# Altium PCB PCB2.PcbDoc
Units mm, origin at the board's own origin, x right, y up, seen from the top; angles counter-clockwise.
Board outline 56.1 x 45.5 mm, 2 copper layers (Top Layer, Bottom Layer); 35 components, 23 nets, 86 pads, 0 vias.
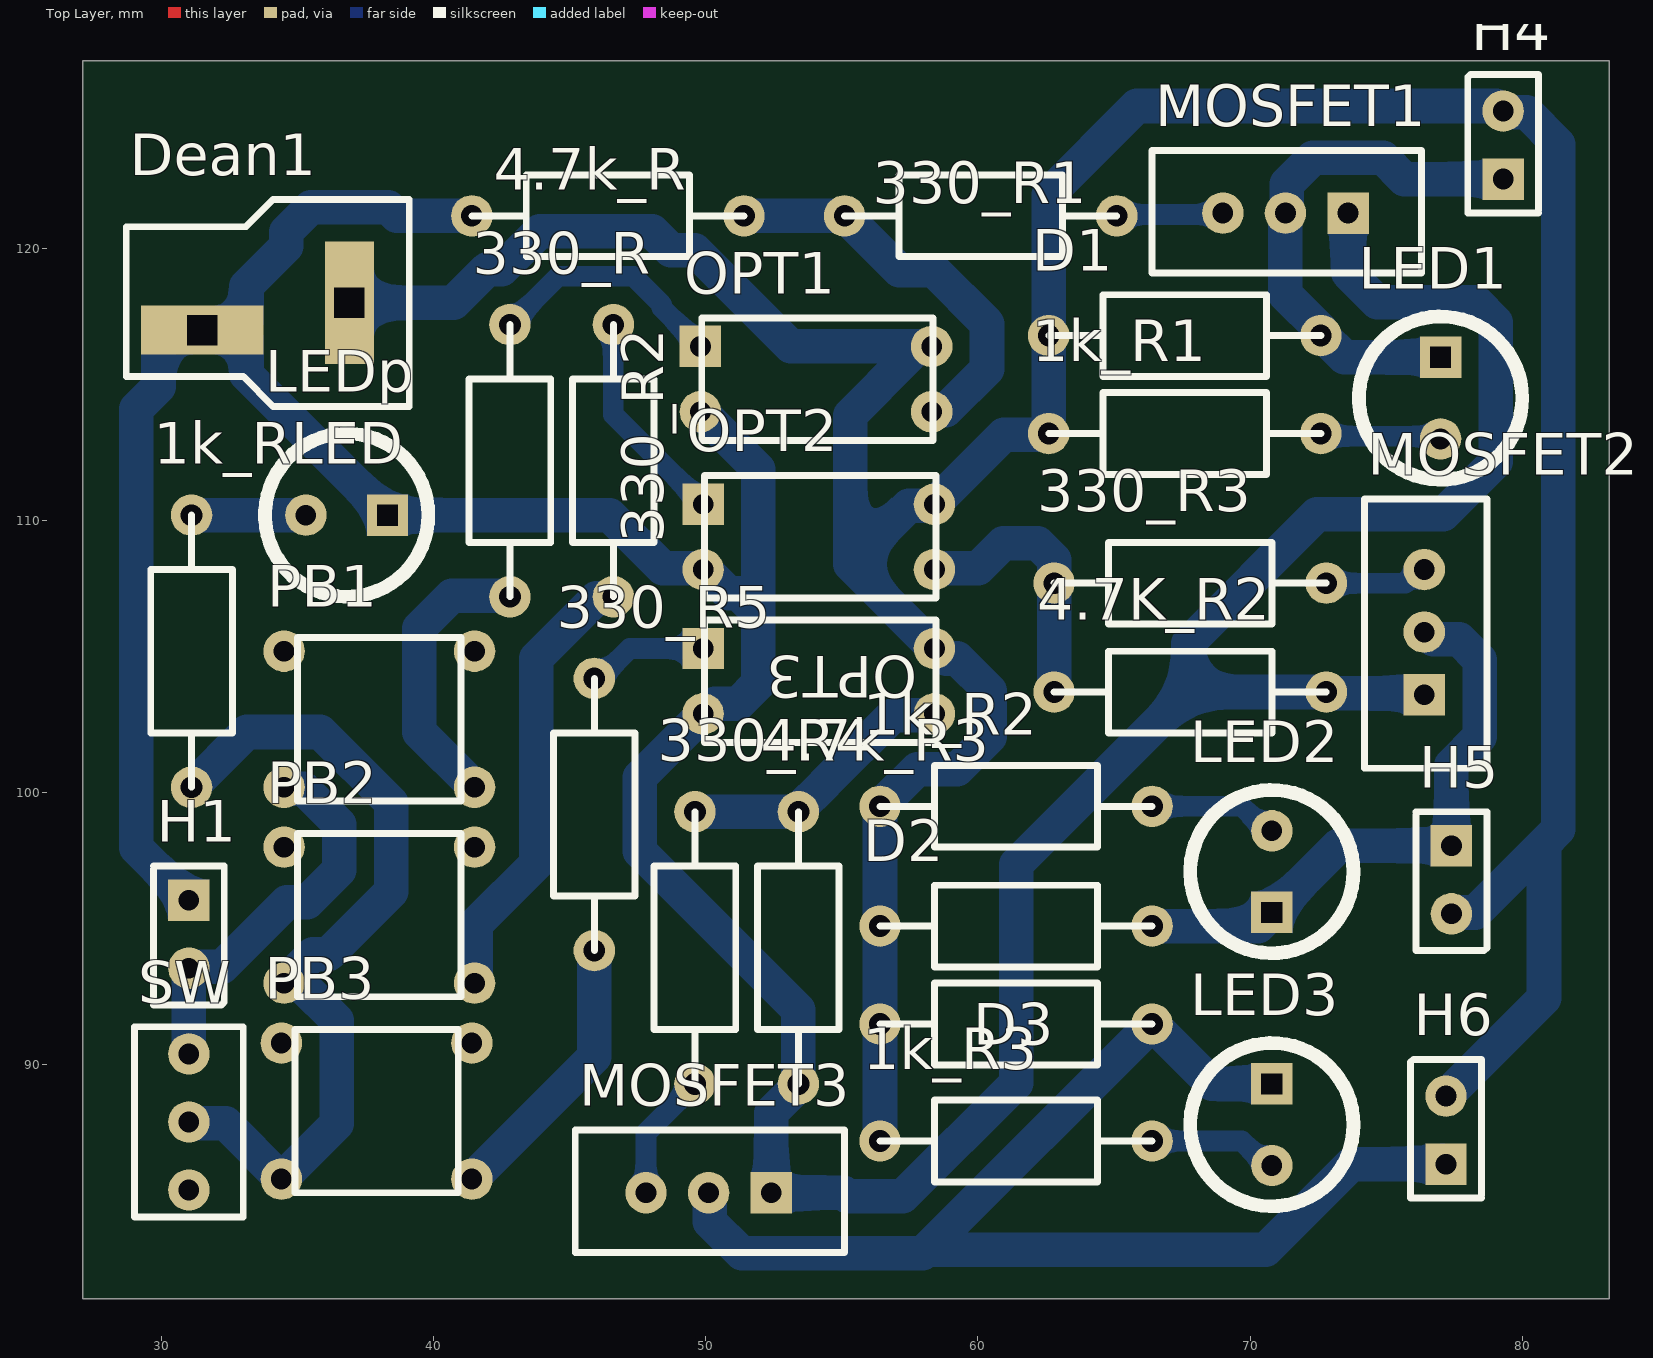
[diagram p0: Top Layer view]
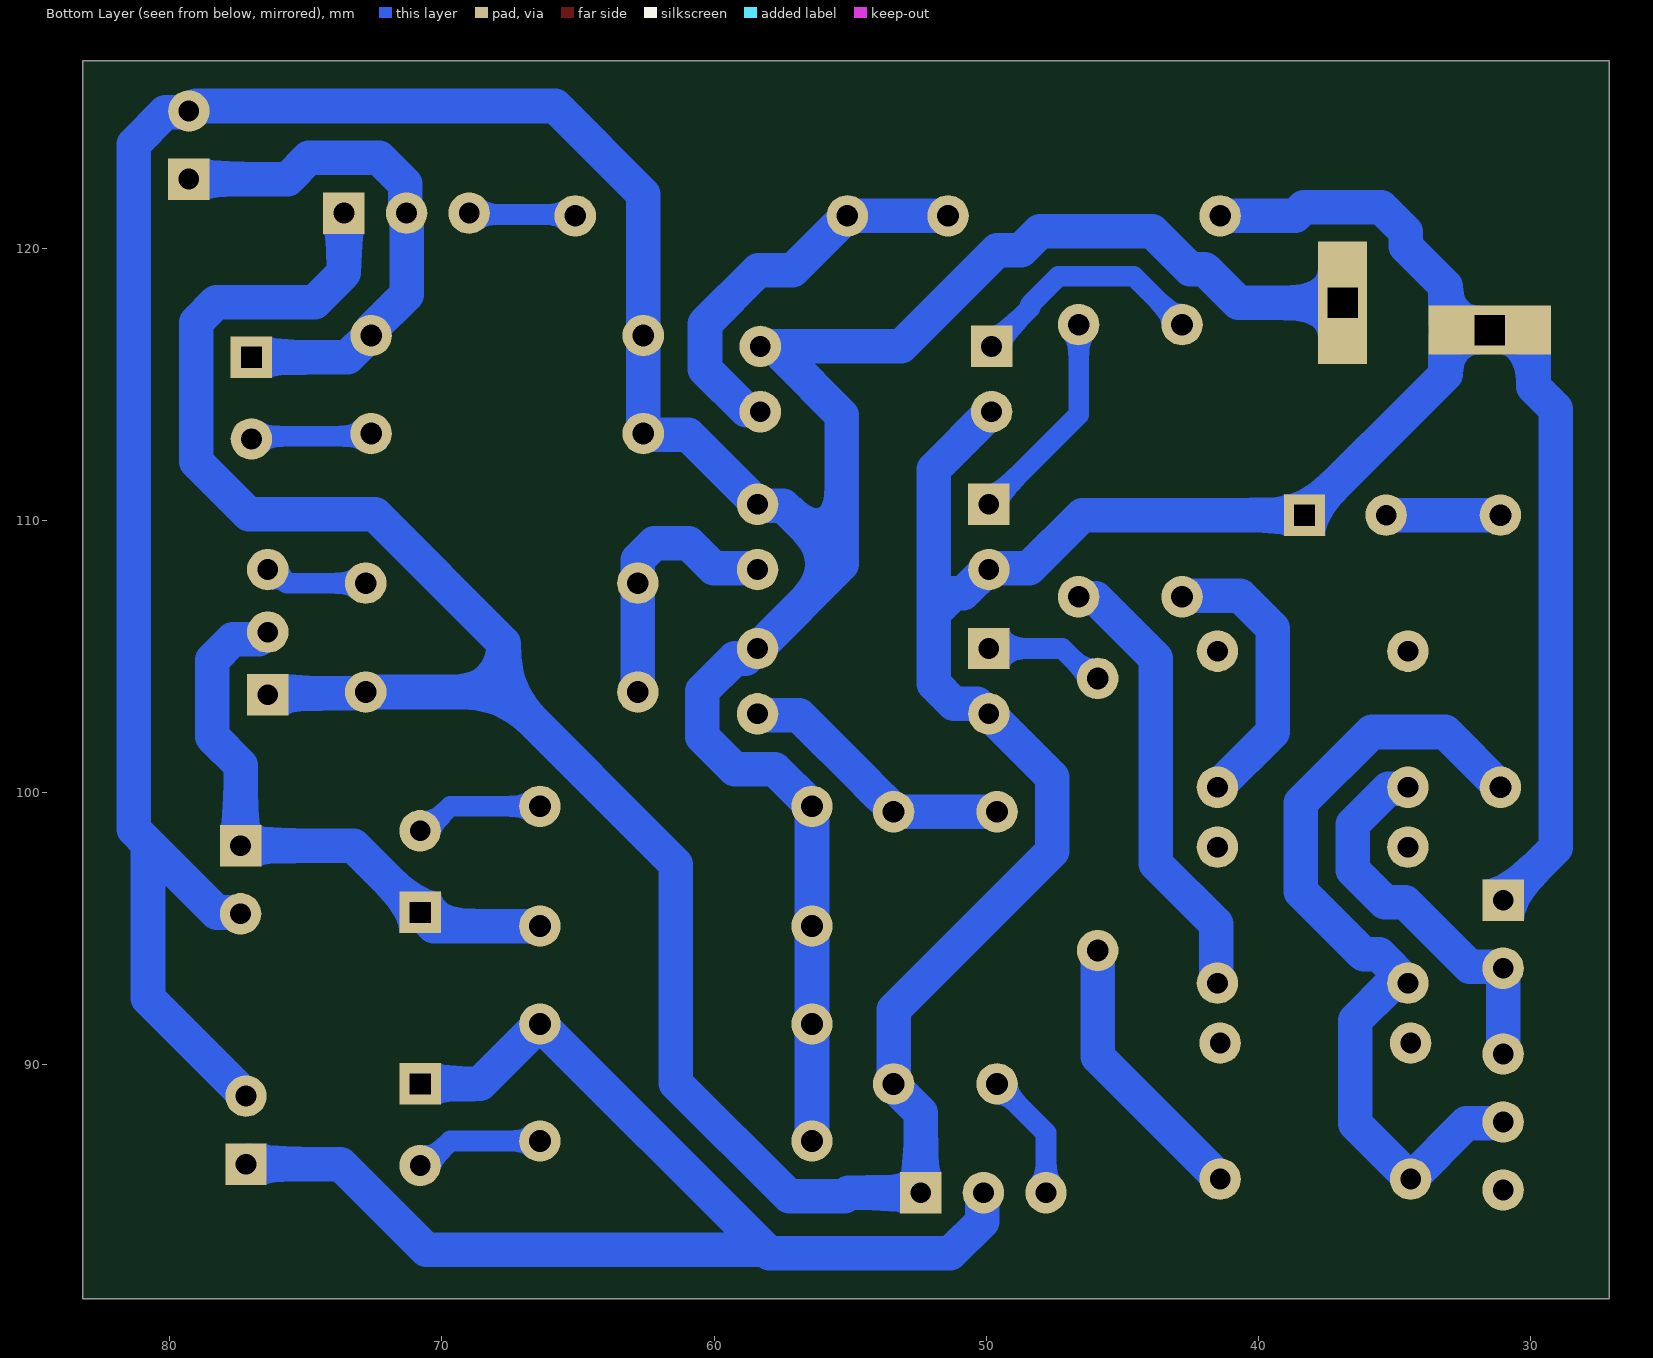
[diagram p1: Bottom Layer view, seen from below]

## Layer stack, top to bottom
Top Solder: solder mask 0.0102, Solder Resist, Dk 3.5
Top Layer: signal copper 0.0356
Dielectric 1: dielectric 0.32, FR-4, Dk 4.8
Bottom Layer: signal copper 0.0356
Bottom Solder: solder mask 0.0102, Solder Resist, Dk 3.5

## Board outline
27.1,81.4 27.1,126.9 83.2,126.9 83.2,81.4

## Design rules (kind name [scope] priority, off if disabled: settings)
Clearance [All] p1: gap=0.635 ignorepadtopadclearanceinfootprint=FALSE
PolygonConnect [All] p1: connectstyle=Relief reliefconductorwidth=0.254 reliefentries=4 polygonreliefangle="90 Angle" airgapwidth=0.254
RoutingVias [All] p1: holewidth=0.711 width=1.27 viastyle="Through Hole" minholewidth=0.711 minwidth=1.27 maxholewidth=0.711 maxwidth=1.27
SolderMaskExpansion [All] p1: expansion=0.102 istentingtop=FALSE
Width [All] p1: maxlimit=1.27 minlimit=0.635 preferedwidth=0.762
30 further rules are at their usual default settings.

## Components (designator, comment, footprint, x,y, rotation, side; value= is the part's Value field where it differs from the comment)
1k_R1 "1K_resistor" 1k_resistor 67.6,113.2 r0 top
1k_R2 "1K_resistor" 1k_resistor 61.4,99.5 r0 top
1k_R3 "1K_resistor" 1k_resistor 61.4,87.2 r0 top
1k_RLED "1K" 1k_resistor 31.1,105.2 r270 top
4.7k_R "4.7k_Resistor" 4.7k_resistor 46.4,121.2 r0 top
4.7K_R2 "4.7k_Resistor" 4.7k_resistor 67.8,103.7 r180 top
4.7k_R3 "4.7k_Resistor" 4.7k_resistor 53.4,94.3 r90 top
330_R "330_Resistor" 330_resistor 42.8,112.2 r270 top
330_R1 "330_Resistor" 330_resistor 60.1,121.2 r180 top
330_R2 "330_Resistor" 330_resistor 46.6,112.2 r270 top
330_R3 "330_Resistor" 330_resistor 67.8,107.7 r180 top
330_R4 "330_Resistor" 330_resistor 49.6,94.3 r90 top
330_R5 "330_Resistor" 330_resistor 45.9,99.2 r270 top
D1 "Diode" Diode 67.6,116.8 r0 top
D2 "Diode" Diode 61.4,95.1 r0 top
D3 "Diode" Diode 61.4,91.5 r0 top
Dean1 "Dean_connector" Dean_connector 33.6,118 r180 top
H1 "Header_Power" 2_pinHeader 31,94.8 r90 top
H4 "Header_Power" 2_pinHeader 79.3,123.8 r270 top
H5 "Header_Power" 2_pinHeader 77.4,96.8 r90 top
H6 "Header_Power" 2_pinHeader 77.2,87.6 r270 top
LED1 "LED" LED 77,114.5 r270 top
LED2 "LED" LED 70.8,97.1 r90 top
LED3 "LED" LED 70.8,87.8 r270 top
LEDp "LED" LED 36.8,110.2 r180 top
MOSFET1 "MOSFET" MOSFET_IR540N 71.3,121.3 r0 top
MOSFET2 "MOSFET" MOSFET_IR540N 76.4,105.9 r270 top
MOSFET3 "MOSFET" MOSFET_IR540N 50.1,85.3 r0 top
OPT1 "Optocoupler" optocoupler 54.1,115.2 r0 top
OPT2 "Optocoupler" optocoupler 54.2,109.4 r0 top
OPT3 "Optocoupler" optocoupler 54.2,104.1 r0 top
PB1 "Push_Button" push_button 38,102.7 r90 top
PB2 "Push_Button" push_button 38,95.5 r90 top
PB3 "Push_Button" push_button 37.9,88.3 r90 top
SW "Slide_Switch" Slide_switch 31,87.9 r270 top

## Footprints (in the part's own frame and the unit in brackets; to place one, negate y for a bottom-side part, rotate by r counter-clockwise, add the part's x,y. Pads: shape width x height; smd on the part's side, far side on the other; paste and mask are expansions set on the pad)
1k_resistor [mm] "1Kohms"
  round 1.524 hole 0.8: 1(5,0) 2(-5,0)
  silkscreen extent -5,-1.5 5,1.5
2_pinHeader [mil]
  round 60 hole 30: 1(-49.21,0)
  rect 60x60 hole 30: 2(49.21,0)
  silkscreen extent -102,-51 98,51
4.7k_resistor [mm] "4.7Kohms"
  round 1.524 hole 0.8: 1(5,0) 2(-5,0)
  silkscreen extent -5,-1.5 5,1.5
330_resistor [mm] "330Kohms"
  round 1.524 hole 0.8: 1(5,0) 2(-5,0)
  silkscreen extent -5,-1.5 5,1.5
Dean_connector [mm]
  rect 4.5x1.8 hole 1.1 square: 1(2.1,1)
  rect 1.8x4.5 hole 1.1 square: 2(-3.3,0)
  silkscreen extent -5.5,-3.8 4.9,3.8
Diode [mm] "flyback_Diode"
  round 1.524 hole 0.8: 1(5,0) 2(-5,0)
  silkscreen extent -5,-1.5 5,1.5
LED [mil]
  rect 60x60 hole 30 square: 1(-59.06,0)
  round 60 hole 30: 2(59.06,0)
  silkscreen extent -118,-118 118,118
MOSFET_IR540N [mil]
  round 60 hole 30: 1(-90.55,0) 2(0,0)
  rect 60x60 hole 30: 3(90.55,0)
  silkscreen extent -193,-87 197,91
optocoupler [mil]
  rect 60x60 hole 30: 1(-169.29,47.24)
  round 60 hole 30: 2(-169.29,-47.24) 3(165.35,-47.24) 4(165.35,47.24)
  silkscreen extent -167,-89 167,89
push_button [mil]
  round 60 hole 30: 1(-98.43,137.8) 2(-98.43,-137.8) 3(98.43,-137.8) 4(98.43,137.8)
  silkscreen extent -118,-118 118,118
Slide_switch [mil]
  round 60 hole 30: 1(-98.43,0) 2(0,0) 3(98.43,0)
  silkscreen extent -138,-79 138,79

## Part data
1k_RLED: library part 1K_resistor

## Nets (pads, with @x,y where several pads share a name; then routed paths per layer and width w, separated by ;. In a path a pad name is that pad's centre, name@x,y a point inside that pad or via, vN(x,y) a via of type N, cw(c..) or ccw(c..) an arc to the next point about the centre after c; other vN are vias at no path point)
Net1k_R1_1: 1k_R1.1 LED1.2 | length 4.5
  Bottom Layer w0.762: 1k_R1.1 72.7,113.1 76.9,113.1 LED1.2
Net1k_R1_2: 1k_R1.2 1k_R2.2 1k_R3.2 D1.2 D2.2 D3.2 Dean1.2 H4.1 H5.1 H6.1 OPT1.4 OPT2.4 OPT3.4 | length 138.7
  Bottom Layer w1.27: Dean1.2 40.726,118 41.958,119.232 42.497,119.232 43.894,120.629 48.02,120.629 48.719,119.93 49.59,119.93 53.12,116.4 OPT1.4 ; 1k_R3.2 D3.2 D2.2 1k_R2.2 ; 1k_R2.2@56.449,99.549 57.768,100.868 59.242,100.868 60.432,102.058 60.432,103.742 59.242,104.932 58.837,104.932 58.469,105.3 OPT3.4 55.3,108.4 ; 57.458,116.032 55.3,113.874 55.3,108.4 ; H6.1 80.8,92.45 80.8,98.13 ; H5.1 77.449,95.599 78.269,95.599 80.8,98.13 ; 55.3,108.4 57.451,110.551 58.351,110.551 OPT2.4 60.951,113.151 62.551,113.151 1k_R1.2 D1.2 62.6,122 65.837,125.237 79.044,125.237 79.231,125.05 H4.1 79.349,125.001 80.169,125.001 81.332,123.838 81.332,98.662 80.8,98.13
Net1k_R2_1: 1k_R2.1 LED2.2 | length 4.8
  Bottom Layer w0.762: 1k_R2.1 69.694,99.5 70.594,98.6 LED2.2
Net1k_R3_1: 1k_R3.1 LED3.2 | length 4.8
  Bottom Layer w0.762: 1k_R3.1 69.694,87.2 70.594,86.3 LED3.2
Net1k_RLED_1: 1k_RLED.1 PB2.1 PB3.1 SW.2 | length 31.3
  Bottom Layer w1.27: SW.2 31.049,87.851 32.349,87.851 PB3.1 36.432,87.832 36.432,91.642 35.122,92.951 34.549,92.951 PB2.1 35.563,94.063 36.131,94.063 38.437,96.369 38.437,99.631 35.836,102.232 33.132,102.232 1k_RLED.1
Net1k_RLED_2: 1k_RLED.2 LEDp.2 | length 4.2
  Bottom Layer w1.27: 1k_RLED.2 LEDp.2
Net4.7K_R2_1: 4.7K_R2.1 330_R3.1 OPT2.3 | length 9.9
  Bottom Layer w1.27: OPT2.3 58.449,108.249 60.012,108.249 60.925,109.161 62.195,109.161 62.8,108.556 330_R3.1 4.7K_R2.1
Net4.7K_R2_2: 4.7K_R2.2 4.7k_R3.2 4.7k_R.2 Dean1.1 H1.2 LEDp.1 MOSFET1.3 MOSFET2.3 MOSFET3.3 OPT1.2 OPT2.2 OPT3.2 | length 161.4
  Bottom Layer w1.27: H1.2 29.068,97.982 29.068,114.1 29.885,114.917 29.885,116.735 30.15,117 Dean1.1 Dean1.1@32.85,117 ; 4.7k_R.2 38.646,121.2 38.326,121.52 35.474,121.52 34.576,120.622 34.576,120.076 33.115,118.615 33.115,117.265 Dean1.1@32.85,117 ; OPT1.2 49.82,114 51.932,111.888 51.932,106.588 ; MOSFET1.3 73.6,119.1 74.668,118.032 78.288,118.032 79.032,117.288 79.032,112.158 77.106,110.232 72.458,110.232 67.726,105.5 67.726,103.7 ; MOSFET2.3 76.349,103.651 72.849,103.651 4.7K_R2.2 67.726,103.7 ; Dean1.1@32.85,117 33.115,116.735 33.115,115.385 LEDp.1 46.474,110.2 48.425,108.249 49.851,108.249 OPT2.2 49.969,108.2 50.837,107.332 51.188,107.332 51.932,106.588 ; 51.932,106.588 51.932,104.012 51.188,103.268 50.337,103.268 49.969,102.9 OPT3.2 47.568,100.568 47.568,97.85 53.4,92.018 4.7k_R3.2 53.4,89.231 52.4,88.231 MOSFET3.3 55.067,85.3 55.199,85.168 57.242,85.168 61.4,89.326 61.4,97.374 67.726,103.7
Net4.7k_R3_1: 4.7k_R3.1 330_R4.1 OPT3.3 | length 10.3
  Bottom Layer w1.27: 330_R4.1 4.7k_R3.1 53.4,99.369 54.368,100.337 54.368,100.342 56.878,102.851 58.351,102.851 OPT3.3
Net4.7k_R_1: 4.7k_R.1 330_R1.1 OPT1.3 | length 15
  Bottom Layer w1.27: 4.7k_R.1@51.351,121.249 4.7k_R.1 330_R1.1 57.103,119.197 58.377,119.197 60.332,117.242 60.332,115.558 58.822,114.049 58.349,114.049 OPT1.3
Net330_R1_2: 330_R1.2 MOSFET1.1 | length 3.9
  Bottom Layer w0.762: 330_R1.2 65.15,121.25 68.95,121.25 MOSFET1.1
Net330_R2_1: 330_R2.1 PB2.2 | length 16.6
  Bottom Layer w1.27: PB2.2 41.549,93.049 41.549,95.175 43.763,97.389 43.763,104.937 45.978,107.151 46.551,107.151 330_R2.1
Net330_R2_2: 330_R2.2 OPT2.1 | length 8
  Bottom Layer w0.762: 330_R2.2 46.6,113.9 OPT2.1
Net330_R3_2: 330_R3.2 MOSFET2.1 | length 3.8
  Bottom Layer w0.762: 330_R3.2 75.694,107.7 76.194,108.2 MOSFET2.1
Net330_R4_2: 330_R4.2 MOSFET3.1 | length 4.7
  Bottom Layer w0.762: MOSFET3.1 47.8,87.5 330_R4.2
Net330_R5_1: 330_R5.1 PB3.2 | length 10.3
  Bottom Layer w1.27: PB3.2 45.9,90.3 330_R5.1
Net330_R5_2: 330_R5.2 OPT3.1 | length 4.5
  Bottom Layer w0.762: 330_R5.2 46.106,104.2 47.206,105.3 OPT3.1
Net330_R_1: 330_R.1 PB1.2 | length 10.5
  Bottom Layer w1.27: PB1.2 39.468,102.232 39.468,106.042 40.658,107.232 42.768,107.232 330_R.1
Net330_R_2: 330_R.2 OPT1.1 | length 8.9
  Bottom Layer w0.762: 330_R.2 44.578,118.978 47.336,118.978 48.378,117.936 48.378,117.822 OPT1.1
NetD1_1: D1.1 H4.2 LED1.1 MOSFET1.2 | length 19.5
  Bottom Layer w0.762: D1.1 D1.1@72.6,117.006
  Bottom Layer w1.27: D1.1 72.669,116.8 73.469,116 LED1.1 ; D1.1@72.6,117.006 71.3,118.306 MOSFET1.2 71.349,121.349 71.349,122.369 72.312,123.332 74.888,123.332 75.67,122.55 H4.2
NetD2_1: D2.1 H5.2 LED2.1 MOSFET2.2 | length 21.9
  Bottom Layer w1.27: D2.1 70.3,95.1 LED2.1 73.25,98.05 H5.2 77.4,101.017 78.432,102.049 78.432,104.888 77.688,105.632 76.737,105.632 76.469,105.9 MOSFET2.2
NetD3_1: D3.1 H6.2 LED3.1 MOSFET3.2 | length 47.2
  Bottom Layer w1.27: MOSFET3.2 50.149,85.251 50.149,84.231 51.312,83.068 57.968,83.068 58.1,83.2 ; LED3.1 68.6,89.3 D3.1 58.1,83.2 ; H6.2@77.073,86.477 H6.2 73.724,86.35 70.574,83.2 58.1,83.2
NetH1_1: H1.1 PB1.1 SW.1 | length 14.5
  Bottom Layer w1.27: SW.1 H1.1 31.049,93.599 32.225,93.599 34.594,95.968 35.342,95.968 36.532,97.158 36.532,98.842 35.222,100.151 34.549,100.151 PB1.1
pads on no net: PB1.3 PB1.4 PB2.3 PB2.4 PB3.3 PB3.4 SW.3

## Silkscreen, mask and mechanical layers (free items; w line width, h text height)
Mechanical 1:
  the board outline again, w0.254